# Altium PCB MONA-ALT-V21-2.PCBDOC
Units mm, origin at the board's own origin, x right, y up, seen from the top; angles counter-clockwise.
Board outline 152.4 x 101.6 mm, 2 copper layers (Top Layer, Bottom Layer); 80 components, 0 nets, 285 pads, 95 vias.
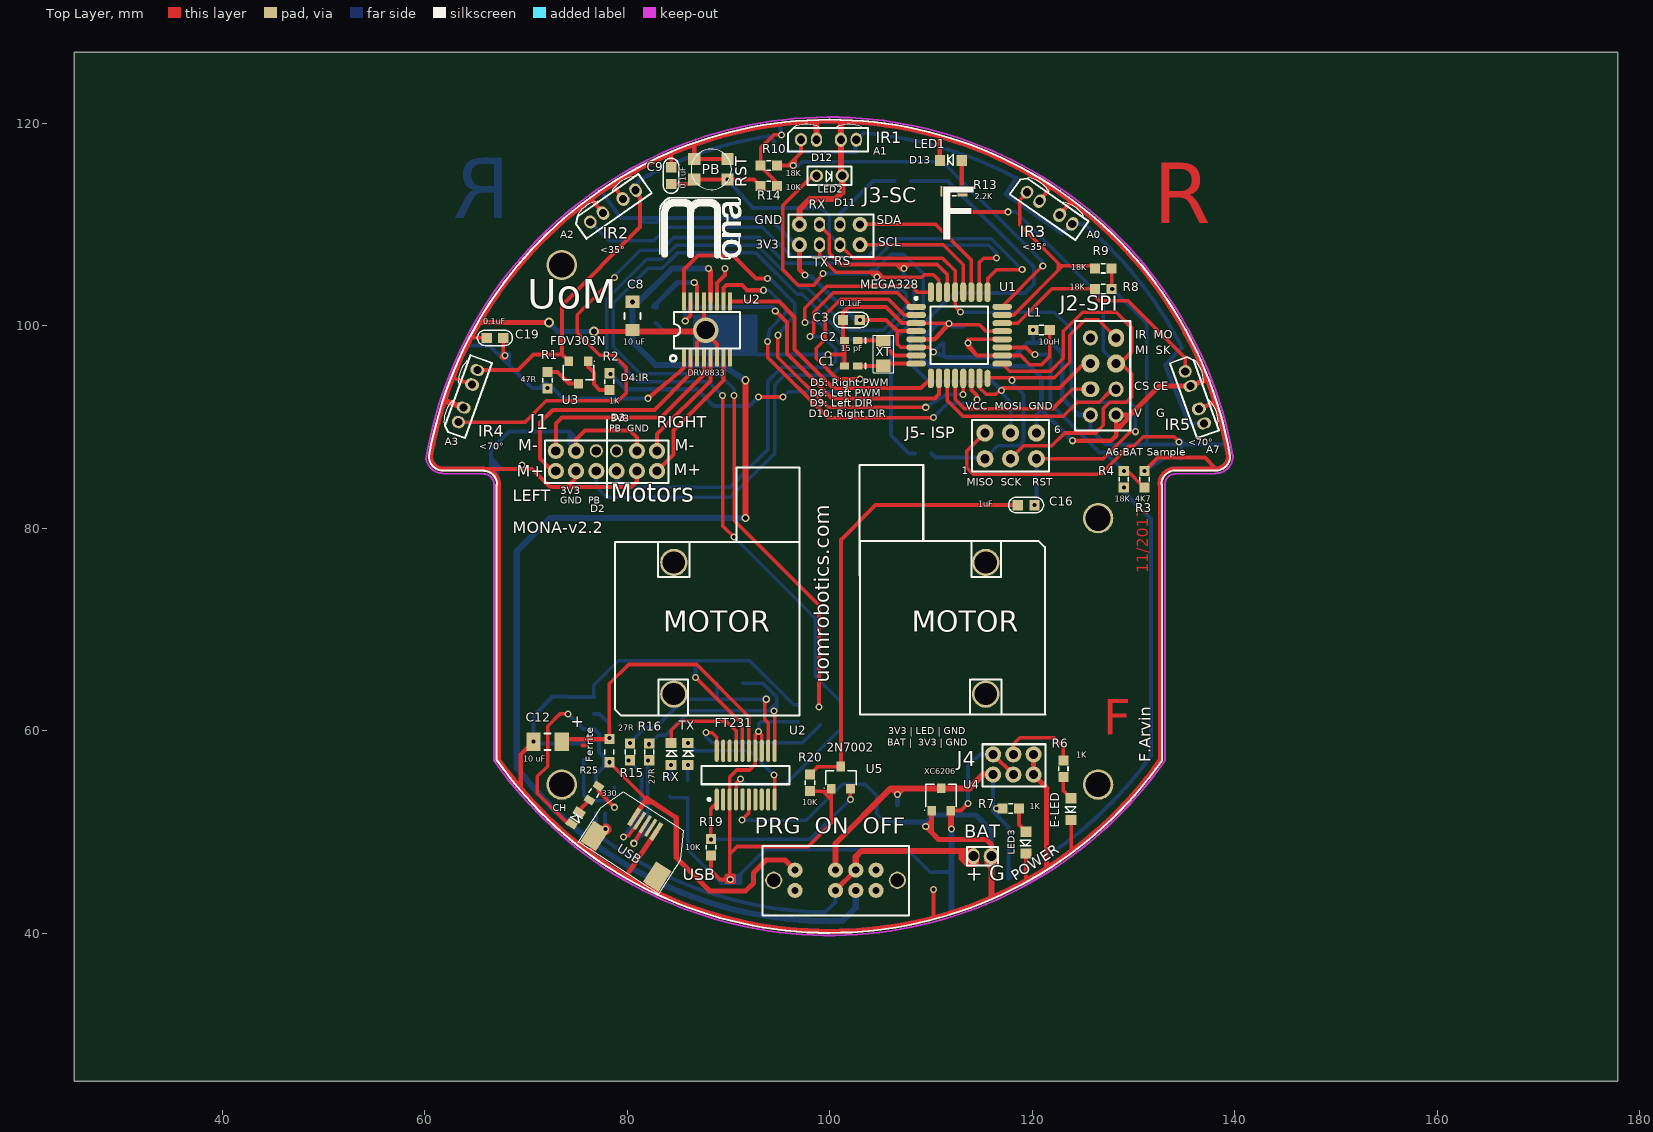
[diagram p0: Top Layer view]
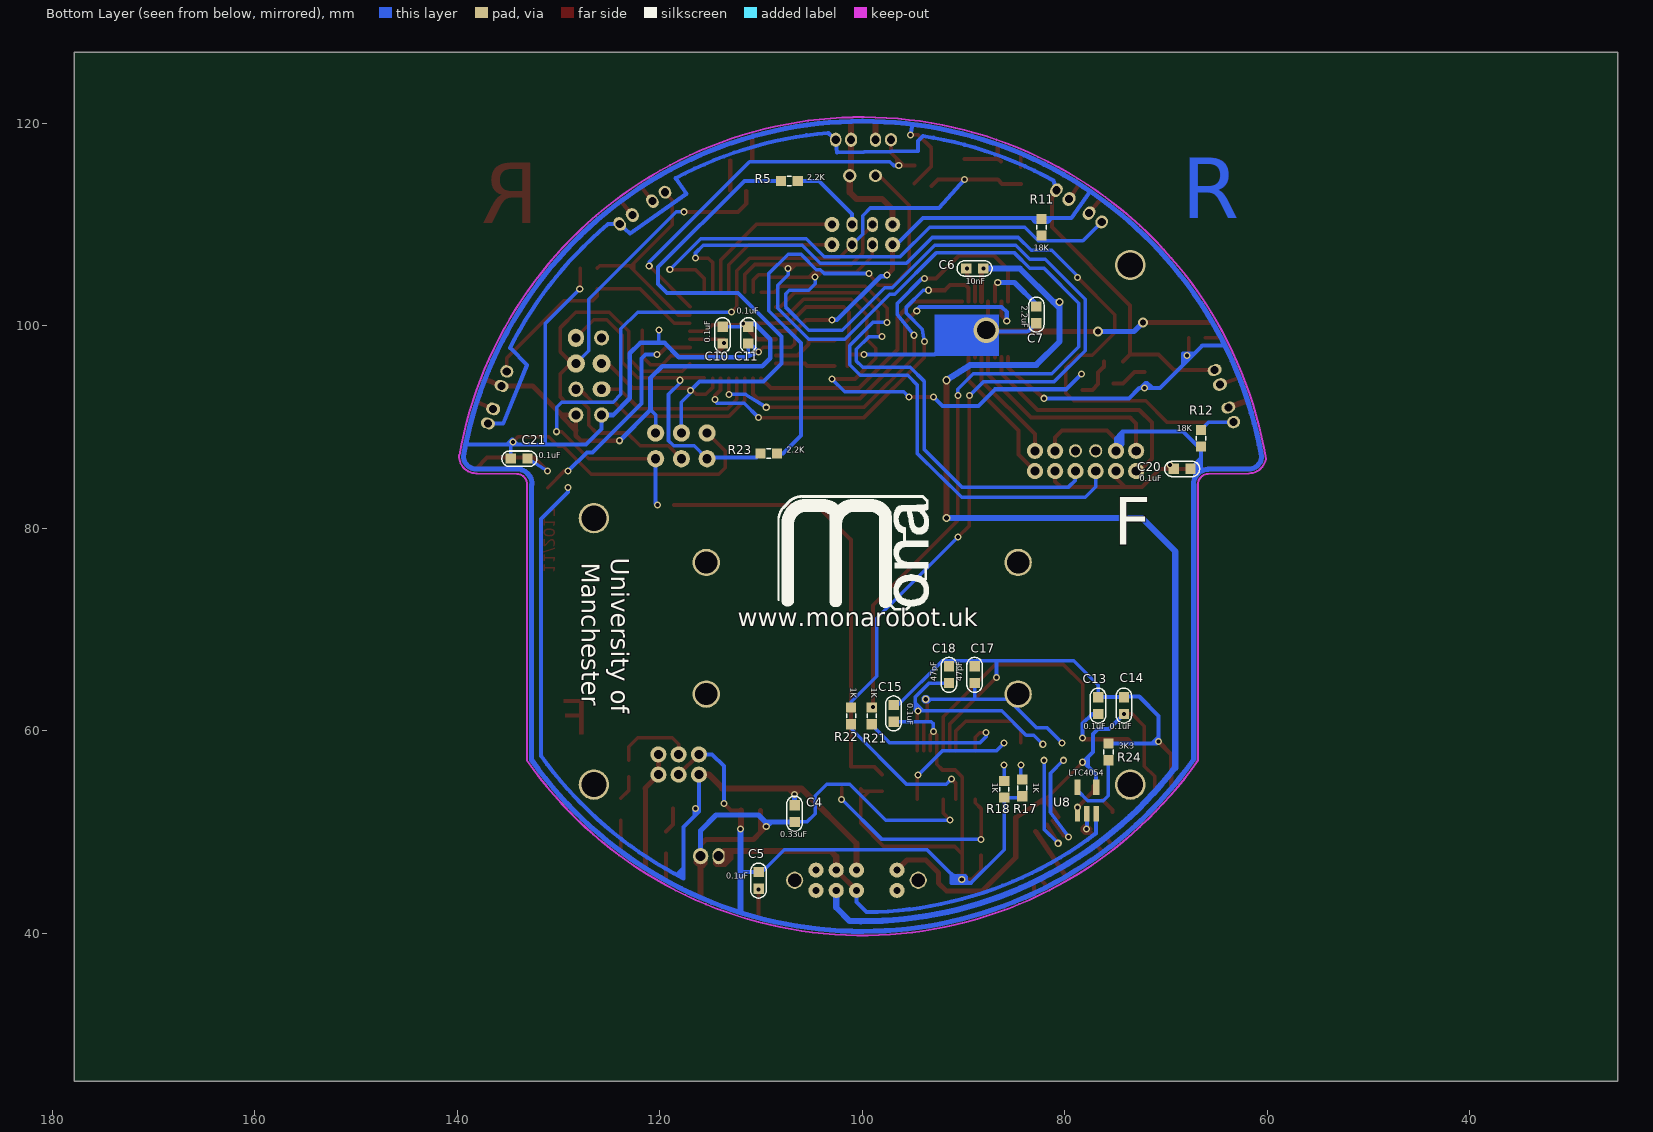
[diagram p1: Bottom Layer view, seen from below]

## Layer stack, top to bottom
Top Layer: signal copper 0.0356
Dielectric: dielectric 0.32, FR-4, Dk 4.8
Bottom Layer: signal copper 0.0356

## Board outline
25.4,25.4 177.8,25.4 177.8,127 25.4,127

## Design rules (kind name [scope] priority, off if disabled: settings)
Clearance [All] p1: gap=0.254
ComponentClearance [All] p1: gap=0.254 collisioncheckmode=3 verticalgap=0.254
PolygonConnect [All] p1: connectstyle=Relief reliefconductorwidth=0.254 reliefentries=4 polygonreliefangle="90 Angle"
RoutingVias [All] p1: holewidth=0.711 width=1.27 viastyle="Through Hole" minholewidth=0.711 minwidth=1.27 maxholewidth=0.711 maxwidth=1.27
SolderMaskExpansion [All] p1: expansion=0.102
TestPointUsage [All] p1: valid=0 allowmultiple=FALSE
Testpoint [All] p1: side=15 testpointundercomponent=TRUE minsize=1.016 maxsize=2.54 preferedsize=1.524 minholesize=0 maxholesize=1.016 preferedholesize=0.813 testpointgrid=0.025 style=1023 order=0123456789
Width [All] p1: maxlimit=0.254 minlimit=0.254 preferedwidth=0.254
18 further rules are at their usual default settings.

## Components (designator, comment, footprint, x,y, rotation, side; value= is the part's Value field where it differs from the comment)
2N7002 "U5" SOT23#1 101.092,55.372 r0 top (schematic designator V48)
BAT "+ G" MHDR1X2#1 114.427,47.625 r0 top
C1 "" 0402 102.108,96.012 r180 top
C2 "15 pF" 0402 102.108,98.552 r180 top
C3 "0.1uF" 0603C 102.108,100.584 r0 top (schematic designator C14)
C4 "0.33uF" 0603C 106.68,51.816 r90 bottom (schematic designator C14)
C5 "0.1uF" 0603C 110.236,45.212 r90 bottom (schematic designator C14)
C6 "10nF" 0603C 88.9,105.664 r180 bottom (schematic designator C14)
C7 "2.2uF" 0603C 82.804,101.092 r270 bottom (schematic designator C14)
C8 "10 uF" 3216[1206]#1 80.518,100.965 r90 top
C9 "0.1uF" 0603C 84.328,114.808 r90 top (schematic designator C14)
C10 "0.1uF" 0603C 113.792,99.06 r90 bottom (schematic designator C14)
C11 "0.1uF" 0603C 111.252,99.06 r90 bottom (schematic designator C14)
C12 "10 uF" 3216[1206]#2 72.136,58.928 r0 top
C13 "0.1uF" 0603C 76.708,62.484 r90 bottom (schematic designator C14)
C14 "0.1uF" 0603C 74.168,62.484 r90 bottom
C15 "0.1uF" 0603C 96.901,61.722 r90 bottom (schematic designator C14)
C16 "1uF" 0603C 119.38,82.296 r0 top (schematic designator C14)
C17 "47pF" 0603C 88.9,65.532 r90 bottom (schematic designator C14)
C18 "47pF" 0603C 91.44,65.532 r90 bottom (schematic designator C14)
C19 "0.1uF" 0603C 66.929,98.806 r0 top (schematic designator C14)
C20 "0.1uF" 0603C 68.402,85.865 r0 bottom (schematic designator C14)
C21 "0.1uF" 0603C 133.858,86.868 r0 bottom (schematic designator C14)
D4 "" 0805L#1 98.552,114.808 r180 top
D4 "CH" 0805L#2 74.168,50.292 r237 top
DRV8833 "U2" SSOP16 87.884,99.568 r0 top locked
E-LED "" 0805L#3 123.825,53.594 r90 top (schematic designator D4)
FDV303N "U3" SOT23#1 75.184,95.377 r180 top (schematic designator V48)
Ferrite "" R0603(1608)#1 78.232,57.912 r90 top (schematic designator R46)
FT231 "U2" SOP63P600X162-20N 91.694,55.626 r90 top
IR1 "Comment" "PCBComponent_1 - duplicate" 104.14,115.316 r0 top
IR2 "Comment" "PCBComponent_1 - duplicate" 83.82,111.76 r35 top
IR3 "Comment" "PCBComponent_1 - duplicate" 123.444,106.68 r325 top
IR4 "Comment" "PCBComponent_1 - duplicate" 68.58,96.012 r70 top
IR5 "Comment" "PCBComponent_1 - duplicate" 134.62,87.884 r290 top
J1 "Comment" HDR2X6_CEN#1 73.152,84.836 r0 top locked
J3-SC "Comment" HDR2X6_CEN#2 97.2,107.188 r0 top locked
J4 "Comment" HDR2X6_CEN#3 116.332,54.864 r0 top locked
"J5- ISP" "Comment" HDR2X3 115.316,86.868 r0 top locked
L1 "10uH" R0603(1608)#2 120.904,99.568 r0 top (schematic designator R46)
LED1 "" 0805L#3 113.284,116.332 r0 top (schematic designator D4)
LED2 "Comment" MHDR1X2#2 99.2,114.808 r0 top
LTC4054 "U8" LT5054 78.74,51.816 r90 bottom locked
MEGA328 "U1" 32A_M 112.776,99.06 r0 top locked
POWER "LED3" 0805L#3 119.38,50.292 r90 top (schematic designator D4)
R1 "47R" R0603(1608)#2 72.136,94.615 r270 top (schematic designator R46)
R2 "1K" R0603(1608)#2 78.232,94.488 r270 top (schematic designator R46)
R3 "4K7" R0603(1608)#2 131.064,84.836 r270 top (schematic designator R46)
R4 "18K" R0603(1608)#2 129.032,84.836 r270 top (schematic designator R46)
R5 "2.2K" R0603(1608)#2 107.188,114.3 r180 bottom (schematic designator R46)
R6 "1K" R0603(1608)#2 123.063,56.261 r90 top (schematic designator R46)
R7 "1K" R0603(1608)#2 117.856,52.324 r0 top (schematic designator R46)
R8 "18K" R0603(1608)#2 127,103.632 r0 top (schematic designator R46)
R9 "18K" R0603(1608)#2 127,105.664 r0 top (schematic designator R46)
R10 "18K" R0603(1608)#2 93.98,115.824 r0 top (schematic designator R46)
R11 "18K" R0603(1608)#2 82.296,109.728 r90 bottom (schematic designator R46)
R12 "18K" R0603(1608)#2 66.548,88.9 r90 bottom (schematic designator R46)
R13 "2.2K" R0603(1608)#2 112.268,113.284 r0 top (schematic designator R46)
R14 "10K" R0603(1608)#2 93.98,113.792 r0 top (schematic designator R46)
R15 "27R" R0603(1608)#2 80.264,57.912 r90 top (schematic designator R46)
R16 "27R" R0603(1608)#2 82.169,57.912 r90 top (schematic designator R46)
R17 "1K" R0603(1608)#2 84.201,54.356 r270 bottom (schematic designator R46)
R18 "1K" R0603(1608)#2 85.979,54.229 r270 bottom (schematic designator R46)
R19 "10K" R0603(1608)#2 88.265,48.514 r90 top (schematic designator R46)
R20 "10K" R0603(1608)#2 98.044,54.864 r90 top (schematic designator R46)
R21 "1K" R0603(1608)#2 99.06,61.468 r270 bottom (schematic designator R46)
R22 "1K" R0603(1608)#2 101.092,61.468 r270 bottom (schematic designator R46)
R23 "2.2K" R0603(1608)#2 109.22,87.376 r180 bottom (schematic designator R46)
R24 "3K3" R0603(1608)#2 75.692,57.912 r90 bottom (schematic designator R46)
R25 "330" R0603(1608)#3 76.708,53.848 r57 top (schematic designator R46)
RST "Comment" "PCBComponent_1 - duplicate4" 88.392,115.316 r0 top
RX "" 0805L#3 84.328,56.388 r270 top (schematic designator D4)
TX "" 0805L#3 85.979,56.388 r270 top (schematic designator D4)
USB "Comment" DIP30 78.232,43.688 r57 top locked
XC6206 "U4" SOT23#2 110.998,53.213 r0 top (schematic designator V48)
? "Comment" "PCBComponent_1 - duplicate3" 106.172,97.536 r90 top
? "Comment" "PCBCOMPONENT_1 - DUPLICATE19" 99.568,45.212 r0 top locked
? "Comment" "PCBCOMPONENT_1 - DUPLICATE17" 81.5,70 r0 top locked
? "Comment" "PCBCOMPONENT_1 - DUPLICATE17" 118.5,70.252 r180 top locked
? "J2-SPI" "PCBComponent_1 - duplicate18" 129.54,89.916 r180 top

## Footprints (in the part's own frame and the unit in brackets; to place one, negate y for a bottom-side part, rotate by r counter-clockwise, add the part's x,y. Pads: shape width x height; smd on the part's side, far side on the other; paste and mask are expansions set on the pad)
32A_M [mm] "Thin QFP, 32-Leads, Body 7x7mm, Pitch 0.8mm, IPC Low Density"
  oval 1.95x0.6 smd: 1(-4.25,2.8) 2(-4.25,2) 3(-4.25,1.2) 4(-4.25,0.4) 5(-4.25,-0.4) 6(-4.25,-1.2) 7(-4.25,-2) 8(-4.25,-2.8) 17(4.25,-2.8) 18(4.25,-2) 19(4.25,-1.2) 20(4.25,-0.4) 21(4.25,0.4) 22(4.25,1.2) 23(4.25,2) 24(4.25,2.8)
  oval 0.6x1.95 smd: 9(-2.8,-4.25) 10(-2,-4.25) 11(-1.2,-4.25) 12(-0.4,-4.25) 13(0.4,-4.25) 14(1.2,-4.25) 15(2,-4.25) 25(2.8,4.25) 26(2,4.25) 27(1.2,4.25) 28(0.4,4.25) 29(-0.4,4.25) 30(-1.2,4.25) 31(-2,4.25) 32(-2.8,4.25)
  oval 0.6x1.7 smd: 16(2.8,-4.25)
  silkscreen extent -4.37,-2.85 2.85,3.77
0402 [mm] "Chip Capacitor; Body 1.0 x 0.5 mm (LxW typ)"
  rect 0.9x0.7 smd: 1(-0.65,0) 2(0.65,0)
  silkscreen extent -1.4,-0.25 -1.4,0.25
0603C [mil]
  rect 40x40 smd: 1(-32,-0.5) 2(33,-0.5)
  silkscreen extent -68,-30 68,30
0805L#1 [mm]
  silkscreen extent -1.64,-0.48 -1.11,0.58
0805L#2 [mm]
  rect 0.7x1.1 smd: 1(-0.635,0) 2(-2.032,0)
  silkscreen extent -1.64,-0.48 -1.11,0.58
0805L#3 [mm]
  rect 1x1.1 smd: 1(-0.254,0) 2(-2.413,0)
  silkscreen extent -1.64,-0.48 -1.11,0.58
3216[1206]#1 [mm] "Chip Resistor; Body 3.2 x 1.6 mm (LxW typ)"
  rect 1.2x1.4 smd: 1(-1.4,0) 2(1.4,0)
  silkscreen extent -0.3,-0.8 0.3,0.8
3216[1206]#2 [mm] "Chip Resistor; Body 3.2 x 1.6 mm (LxW typ)"
  rect 1.4x1.8 smd: 1(-1.4,0) 2(1.4,0)
  silkscreen extent -0.3,-0.8 0.3,0.8
DIP30 [mm]
  rect 2.45x1.8 smd: 0(4.191,4.445) 0(4.191,-2.921)
  rect 2x0.35 smd: " "(7.874,0.235) " "(7.874,0.885) ""(7.874,1.535)
  rect 2x0.45 smd: GND(7.874,-0.415) VDD(7.874,2.185)
  silkscreen extent 2.76,-3.98 9.4,5.46
HDR2X3 [mm] "Connector; Header; 3x2 Position"
  round 1.7 hole 0.9: 1(0,0) 2(0,2.54) 3(2.54,0) 4(2.54,2.54) 5(5.08,0) 6(5.08,2.54)
  silkscreen extent -1.27,-1.27 6.35,3.81
HDR2X6_CEN#1 [mm] "Connector; Header; 6x2 Position"
  round 1.6 hole 0.9: ELGND(1.792,0.812) L+(-0.208,0.812) L-(-0.208,2.812) L-B(3.792,0.812) LE3V3(1.792,2.812) R+(9.792,0.812) R-(9.792,2.812) R-B(5.792,0.812) RE3V3(7.792,2.812) REGND(7.792,0.812)
  round 1.3 hole 0.9: L-A(3.792,2.812) R-A(5.792,2.812)
  silkscreen extent -1.27,-0.38 10.92,3.81
HDR2X6_CEN#2 [mm] "Connector; Header; 6x2 Position"
  round 1.5 hole 0.8: 3V3(-0.208,0.812) GND(-0.208,2.812) SCL(5.792,0.812) SDA(5.792,2.812)
  oval 1.1x1.5 hole 0.8: GPIO(3.792,2.812) RST(3.792,0.812) RX(1.792,2.812) TX(1.792,0.812)
  silkscreen extent -1.27,-0.38 7.11,3.81
HDR2X6_CEN#3 [mm] "Connector; Header; 6x2 Position"
  round 1.6 hole 0.9: 3V3(-0.208,2.812) 4V2(-0.208,0.812) GND(3.792,0.812) GND(3.792,2.812) ""(1.792,0.812) ""(1.792,2.812)
  silkscreen extent -1.27,-0.38 4.95,3.81
LT5054 [mm]
  rect 1.5x0.518 smd: BAT(0,-1.84) GND(0,-0.92) LED(0,0)
  rect 1.5x0.62 smd: PROG(2.62,0) VCC(2.62,-1.84)
MHDR1X2#1 [mm] "Connector; Header; 2 Position"
  oval 1.2x1.6 hole 1: 1(-0.254,0)
  oval 1.5x1.6 hole 1: 2(1.524,0)
  silkscreen extent -0.9,-0.9 2.17,0.9
MHDR1X2#2 [mm] "Connector; Header; 2 Position"
  oval 1.3x1.2 hole 0.8: 1(-0.508,0)
  round 1.3 hole 0.8: 2(2.032,0)
  silkscreen extent -1.4,-0.9 2.92,0.9
"PCBComponent_1 - duplicate" [mm]
  oval 1.1x1.4 hole 0.8: D-A(-1.524,3.048) T-E(-5.461,3.048)
  oval 1.2x1.4 hole 0.8: D-C(-3.048,3.048)
  oval 1.2x1.3 hole 0.8: T-C(-6.985,3.048)
  silkscreen extent -8.25,1.91 -0.38,4.58
"PCBComponent_1 - duplicate3" [mm]
  rect 1.2x1.4 smd: X(-1.49,0.889) X(0.91,0.889)
  silkscreen extent -2.16,-0.13 1.52,1.91
"PCBComponent_1 - duplicate4" [mm]
  rect 1.2x1.2 smd: A(-1.778,-0.889) A(1.524,-0.889) B(-1.778,1.143) B(1.524,1.143)
  silkscreen extent -2.09,-1.87 1.91,2.13
"PCBCOMPONENT_1 - DUPLICATE17" [mm]
  round 2.7 hole 2.2: 0(3.103,6.626) 1(3.103,-6.374)
  silkscreen extent -2.73,-8.51 15.52,16
"PCBComponent_1 - duplicate18" [mm]
  round 1.5 hole 0.9: "1 GND"(1.27,-1.27) "2 Vcc"(3.81,-1.27) "3 CE"(1.27,-3.81) "9 IRQ"(3.81,-8.89)
  oval 1.8x1.5 hole 0.9: "4 CS"(3.81,-3.81)
  round 1.8 hole 0.9: "5 SCK"(1.27,-6.35) "6 MOSI"(3.81,-6.35)
  oval 1.6x1.8 hole 0.9: "7 MISO"(1.27,-8.89)
  silkscreen extent -0.13,-10.54 5.33,0.25
"PCBCOMPONENT_1 - DUPLICATE19" [mm]
  round 1.7 hole 1.3: 1(-5.102,0.034) 1(7.098,0.034)
  round 1.5 hole 0.7: 1(-3.002,1.034) 2(0.998,1.034) 3(2.998,1.034) 4(4.998,1.034) 5(-3.002,-0.966) 6(0.998,-0.966) 7(2.998,-0.966) 8(4.998,-0.966)
  silkscreen extent -6.22,-3.43 8.25,3.43
R0603(1608)#1 [mm] "Chip Resistor, Body 1.6x0.8mm, IPC Medium Density"
  rect 1x1 smd: 1(-1.016,0) 2(1.27,0)
  silkscreen extent -0.2,-0.46 0.2,0.46, body extent -0.85,-0.48 0.85,0.48, height 0.6
R0603(1608)#2 [mm] "Chip Resistor, Body 1.6x0.8mm, IPC Medium Density"
  rect 1x1 smd: 1(-0.82,0) 2(0.82,0)
  silkscreen extent -0.2,-0.46 0.2,0.46, body extent -0.85,-0.48 0.85,0.48, height 0.6
R0603(1608)#3 [mm] "Chip Resistor, Body 1.6x0.8mm, IPC Medium Density"
  rect 0.7x1 smd: 1(-0.82,0) 2(0.82,0)
  silkscreen extent -0.2,-0.46 0.2,0.46, body extent -0.85,-0.48 0.85,0.48, height 0.6
SOP63P600X162-20N [mm] "SOP, 20-Leads, Body 8.7x3.9mm (max), Pitch 0.63mm, IPC Medium Density"
  oval 2.2x0.4 smd: 1(-2.4,2.857) 2(-2.4,2.222) 3(-2.4,1.587) 4(-2.4,0.952) 5(-2.4,0.317) 6(-2.4,-0.318) 7(-2.4,-0.953) 8(-2.4,-1.588) 9(-2.4,-2.222) 10(-2.4,-2.857) 11(2.4,-2.857) 12(2.4,-2.222) 13(2.4,-1.587) 14(2.4,-0.952) 15(2.4,-0.317) 16(2.4,0.318) 17(2.4,0.953) 18(2.4,1.588) 19(2.4,2.222) 20(2.4,2.857)
  silkscreen extent -2.52,-4.35 0.9,4.35, body extent -1.95,-4.33 1.95,4.33, height 1.62
SOT23#1 [mm] "SOT23, 3-Leads, Body 2.9x1.3mm, Pitch 0.95mm, Lead Span 2.5mm, IPC Medium Density"
  rect 0.85x0.95 smd: Drain(0,1.1) Gate(-0.95,-1.1) S(0.95,-1.1)
  silkscreen extent -1.5,-0.7 1.5,0.7, body extent -1.5,-0.7 1.5,0.7, height 1.1
SOT23#2 [mm] "SOT23, 3-Leads, Body 2.9x1.3mm, Pitch 0.95mm, Lead Span 2.5mm, IPC Medium Density"
  rect 0.85x0.95 smd: GND(-0.95,-1.1) IN(0,1.1) OUT(0.95,-1.1)
  silkscreen extent -1.5,-0.7 1.5,1.52, body extent -1.5,-0.7 1.5,0.7, height 1.1
SSOP16 [mm] "SSOP; 16 Leads; Body Width 5.3 mm; Pitch 0.65 mm"
  rect 0.4x1.8 smd: 1(-2.275,-2.68) 2(-1.625,-2.68) 3(-0.975,-2.68) 4(-0.325,-2.68) 5(0.325,-2.68) 6(0.975,-2.68) 7(1.625,-2.68) 8(2.275,-2.68) 9(2.275,2.82) 10(1.625,2.82) 11(0.975,2.82) 12(0.325,2.82) 13(-0.325,2.82) 14(-0.975,2.82) 15(-1.625,2.82) 16(-2.275,2.82)
  silkscreen extent -3.65,-3.09 3.25,1.8

## Part data
2N7002 FDV303N XC6206: library part FDV301N, "N-Channel MOSFET, 0.22A, 25V Vgs=2.7V Rds(on)=5"
C3 C4 C5 C6 C7 C9 C10 C11 C13 C14 C15 C16 C17 C18 C19 C20 C21: library part CAP, "Capacitor"
D4 D4 E-LED LED1 POWER RX TX: library part LED0, "Typical INFRARED GaAs LED"
Ferrite L1 R1 R2 R3 R4 R5 R6 R7 R8 R9 R10 R11 R12 R13 R14 R15 R16 R17 R18 R19 R20 R21 R22 R23 R24 R25: library part "R47 0603 5%", "Resistencia SMT Generica"

## Free pads (board coordinates)
  round 3 hole 2.5: 0(73.533,54.692) 0(73.533,106) 0(126.492,54.692) 0(126.492,81)

## Via types
v1: diameter 0.7, hole 0.4, Top Layer to Bottom Layer, 89 vias
v2: diameter 0.8, hole 0.5, Top Layer to Bottom Layer, 3 vias
v3: diameter 1, hole 0.6, Top Layer to Bottom Layer, 2 vias
v4: diameter 2.5, hole 1.8, Top Layer to Bottom Layer, 1 vias

## Nets (pads, with @x,y where several pads share a name; then routed paths per layer and width w, separated by ;. In a path a pad name is that pad's centre, name@x,y a point inside that pad or via, vN(x,y) a via of type N, cw(c..) or ccw(c..) an arc to the next point about the centre after c; other vN are vias at no path point)
pads on no net: 2N7002.Drain 2N7002.Gate 2N7002.S "?.1 GND" "?.2 Vcc" "?.3 CE" "?.4 CS" "?.5 SCK" "?.6 MOSI" "?.7 MISO" "?.9 IRQ" "J5- ISP.1" "J5- ISP.2" "J5- ISP.3" "J5- ISP.4" "J5- ISP.5" "J5- ISP.6" "USB. " ?.0 ?.1 ?.2 ?.3 ?.4 ?.5 ?.6 ?.7 ?.8 ?.X BAT.1 BAT.2 C1.1 C1.2 C2.1 C2.2 C3.1 C3.2 C4.1 C4.2 C5.1 C5.2 C6.1 C6.2 C7.1 C7.2 C8.1 C8.2 C9.1 C9.2 C10.1 C10.2 C11.1 C11.2 C12.1 C12.2 C13.1 C13.2 C14.1 C14.2 C15.1 C15.2 C16.1 C16.2 C17.1 C17.2 C18.1 C18.2 C19.1 C19.2 C20.1 C20.2 C21.1 C21.2 D4.1 D4.2 DRV8833.1 DRV8833.2 DRV8833.3 DRV8833.4 DRV8833.5 DRV8833.6 DRV8833.7 DRV8833.8 DRV8833.9 DRV8833.10 DRV8833.11 DRV8833.12 DRV8833.13 DRV8833.14 DRV8833.15 DRV8833.16 E-LED.1 E-LED.2 FDV303N.Drain FDV303N.Gate FDV303N.S Ferrite.1 Ferrite.2 FT231.1 FT231.2 FT231.3 FT231.4 FT231.5 FT231.6 FT231.7 FT231.8 FT231.9 FT231.10 FT231.11 FT231.12 FT231.13 FT231.14 FT231.15 FT231.16 FT231.17 FT231.18 FT231.19 FT231.20 IR1.D-A IR1.D-C IR1.T-C IR1.T-E IR2.D-A IR2.D-C IR2.T-C IR2.T-E IR3.D-A IR3.D-C IR3.T-C IR3.T-E IR4.D-A IR4.D-C IR4.T-C IR4.T-E IR5.D-A IR5.D-C IR5.T-C IR5.T-E J1.ELGND J1.L+ J1.L- J1.L-A J1.L-B J1.LE3V3 J1.R+ J1.R- J1.R-A J1.R-B J1.RE3V3 J1.REGND J3-SC.3V3 J3-SC.GND J3-SC.GPIO J3-SC.RST J3-SC.RX J3-SC.SCL J3-SC.SDA J3-SC.TX J4. J4.3V3 J4.4V2 J4.GND L1.1 L1.2 LED1.1 LED1.2 LED2.1 LED2.2 LTC4054.BAT LTC4054.GND LTC4054.LED LTC4054.PROG LTC4054.VCC MEGA328.1 MEGA328.2 MEGA328.3 MEGA328.4 MEGA328.5 MEGA328.6 MEGA328.7 MEGA328.8 MEGA328.9 MEGA328.10 MEGA328.11 MEGA328.12 MEGA328.13 MEGA328.14 MEGA328.15 MEGA328.16 MEGA328.17 MEGA328.18 MEGA328.19 MEGA328.20 MEGA328.21 MEGA328.22 MEGA328.23 MEGA328.24 MEGA328.25 MEGA328.26 MEGA328.27 MEGA328.28 MEGA328.29 MEGA328.30 MEGA328.31 MEGA328.32 POWER.1 POWER.2 R1.1 R1.2 R2.1 R2.2 R3.1 R3.2 R4.1 R4.2 R5.1 R5.2 R6.1 R6.2 R7.1 R7.2 R8.1 R8.2 R9.1 R9.2 R10.1 R10.2 R11.1 R11.2 R12.1 R12.2 R13.1 R13.2 R14.1 R14.2 R15.1 R15.2 R16.1 R16.2 R17.1 R17.2 R18.1 R18.2 R19.1 R19.2 R20.1 R20.2 R21.1 R21.2 R22.1 R22.2 R23.1 R23.2 R24.1 R24.2 R25.1 R25.2 RST.A RST.B RX.1 RX.2 TX.1 TX.2 USB. USB.0 USB.GND USB.VDD XC6206.GND XC6206.IN XC6206.OUT
copper on no net: | length 3123.6
  Top Layer w0.2: 70.231,85.852 69.85,86.233 v1(69.596,86.233) ; v1(69.596,86.233) 69.215,85.852 69.088,85.852 69.469,86.233 v1(69.596,86.233)
  Top Layer w0.35: 63.327,90.491 69.917,90.491 72.009,92.583 79.121,92.583 79.883,93.345 79.883,95.885 78.676,97.091 77.279,97.091 75.057,99.314 75.057,100.711 75.057,101.092 v1(78.74,104.775) ; 64.656,98.793 66.116,98.793 ; 67.767,98.793 v1@67.767,97.231 ; v1(74.155,61.671) 73.355,61.671 72.136,60.452 72.136,56.515 71.12,55.499 71.12,53.848 74.143,50.825 74.514,50.825 ; v1(78.232,56.896) 81.788,53.34 81.915,53.34 ; v1(78.232,59.309) 78.232,64.643 80.137,66.548 86.868,66.548 92.011,61.404 92.011,58.026 ; v1(79.629,49.53) 79.756,49.53 79.883,49.657 80.137,49.657 81.233,51.128 ; v1(80.645,48.895) 81.778,50.774 ; 84.328,58.801 84.328,60.071 85.217,60.96 89.789,60.96 90.742,60.008 90.742,58.026 ; 84.341,115.646 84.341,117.081 ; v1(86.741,65.278) 91.376,60.642 91.376,58.026 ; v1(87.757,59.817) 88.392,59.817 88.837,59.372 88.837,58.026 ; v1@88.265,49.334 88.265,52.324 88.837,52.895 88.837,53.226 ; v1(89.408,93.091) 89.408,80.264 v1(90.551,79.121) ; v1(90.17,45.339) 90.106,45.148 90.106,55.435 90.805,56.134 92.075,56.134 92.647,56.706 92.647,58.026 92.647,59.627 v1(92.964,59.944) 93.281,59.627 93.281,58.026 ; 90.17,47.879 90.871,48.58 97.856,48.58 100.142,50.866 100.142,54.272 99.914,54.044 98.044,54.044 ; v1(90.551,93.091) 90.551,80.899 90.551,80.772 98.933,72.39 v1(98.933,62.357) ; 90.742,53.226 90.742,54.8 v1(91.186,55.245) ; v1(91.313,51.181) 92.011,51.88 92.011,53.226 ; 92.582,114.37 93.16,113.792 ; v1(92.964,92.964) v1(95.377,92.964) ; v1(93.726,63.119) 93.726,62.865 93.599,62.738 93.599,61.087 93.916,60.77 93.916,58.026 ; v1(93.853,98.425) 93.853,96.901 99.822,90.932 v1(110.236,90.932) ; v1(94.488,55.626) 94.551,55.562 94.551,53.226 ; v1(94.488,61.976) 94.488,61.722 94.551,61.658 94.551,58.026 ; 94.8,115.824 95.885,115.824 ; v1(94.869,99.06) 94.869,96.901 99.822,91.948 v1(109.474,91.948) ; 94.869,114.046 93.16,115.755 93.16,115.824 93.16,117.544 94.456,118.84 v1(95.218,118.84) ; 96.603,116.542 96.603,116.161 96.266,115.824 95.885,115.824 ; 97.155,118.364 97.155,117.094 95.885,115.824 ; v1(97.536,100.33) 97.536,101.727 99.695,103.886 108.077,103.886 108.653,103.31 109.976,103.31 ; 98.044,55.684 98.832,56.472 101.092,56.472 ; v1(98.044,98.933) 98.425,99.314 98.425,101.346 100.33,103.251 106.68,103.251 108.071,101.86 108.526,101.86 ; 98.692,114.808 98.298,114.808 95.377,111.887 95.377,105.537 96.901,104.013 98.425,104.013 v1(99.314,105.156) ; 98.992,108 98.992,106.875 100.584,105.283 104.394,105.283 v1@104.902,104.775 ; 98.992,110 98.992,109.923 99.949,108.966 99.949,107.188 101.092,106.045 110.617,106.045 111.576,105.086 111.576,103.31 ; 99.314,54.044 99.314,54.041 100.142,53.213 ; 100.992,108 102.312,106.68 111.125,106.68 112.376,105.429 112.376,103.31 112.376,101.873 v1(112.903,101.346) ; v1@102.042,53.025 102.042,54.399 ; 102.992,108 111.202,108 113.176,106.026 113.176,103.31 ; 102.992,110 110.472,110 113.976,106.496 113.976,103.31 ; v1(102.997,94.742) 100.711,94.742 98.679,96.774 98.679,97.79 99.568,98.679 99.568,101.092 101.092,102.616 105.791,102.616 107.347,101.06 108.526,101.06 ; 106.553,106.045 107.061,105.537 107.315,105.537 107.823,106.045 ; 106.661,99.46 106.661,98.19 106.991,97.86 108.526,97.86 109.785,97.86 v1(110.236,97.409) ; 110.776,103.31 110.776,104.489 110.236,105.029 109.347,105.029 109.093,104.775 v1@104.902,104.775 ; 111.576,94.81 111.576,92.64 113.157,91.059 123.063,91.059 124.46,92.456 126.619,92.456 127.762,93.599 128.016,93.599 ; v1@112.014,100.076 114.808,100.076 115.424,99.46 117.026,99.46 ; 112.376,94.81 112.376,92.729 113.284,91.821 122.047,91.821 123.952,93.726 125.73,93.726 ; 112.903,48.133 112.903,47.371 113.538,46.736 114.427,46.736 114.554,46.863 114.554,48.006 114.427,48.133 113.665,48.133 113.411,47.879 ; v1@113.176,93.345 113.176,94.81 ; 113.411,47.371 113.411,47.879 ; 114.776,94.81 114.776,93.885 115.443,93.218 116.382,93.218 117.017,93.853 119.444,93.853 122.682,93.853 125.349,96.52 ; 114.776,103.31 114.776,106.267 115.189,106.68 v1(116.459,106.68) ; 115.316,86.233 115.316,86.868 ; 115.316,89.408 113.538,87.63 113.538,85.979 114.173,85.344 126.746,85.344 128.175,86.773 129.508,88.106 130.016,88.106 130.937,89.027 133.985,89.027 v1(134.493,88.519) ; 115.443,47.244 115.443,46.863 115.697,46.609 ; 115.576,94.869 122.174,94.869 123.698,96.393 123.698,99.06 125.222,100.584 126.492,100.584 128.27,98.806 ; 115.576,103.31 115.576,104.654 116.459,105.537 v1(118.999,105.537) ; 115.951,46.482 116.459,46.99 116.459,47.117 ; 117,101.887 v1(121.031,105.918) ; 117.026,96.26 117.782,95.504 121.793,95.504 123.063,96.774 123.063,99.441 124.968,101.346 128.27,101.346 129.794,99.822 129.794,97.409 128.651,96.266 ; 117.026,98.66 113.646,98.66 ; 117.026,100.26 118.548,100.26 121.92,103.632 126.18,103.632 126.18,102.928 126.619,102.489 129.413,102.489 135.095,96.807 135.095,95.49 ; 117.026,101.06 118.168,101.06 122.917,105.81 118.745,109.982 118.745,112.395 119.47,113.12 119.47,113.183 ; 117.856,86.868 119.126,88.138 121.92,88.138 123.19,89.408 126.238,89.408 127,90.17 127,91.821 127.635,92.456 129.286,92.456 129.794,92.964 129.794,95.25 128.778,96.266 128.27,96.266 ; 118.124,57.676 118.124,58.688 118.745,59.309 122.174,59.309 123.063,58.42 123.063,57.081 ; 120.396,86.868 127,86.868 129.667,89.535 v1(130.175,89.535) ; 121.724,99.568 121.724,96.959 120.904,96.139 119.761,96.139 118.84,97.06 117.026,97.06 114.522,97.06 ; 123.063,55.441 123.063,54.102 123.825,53.34 ; 123.825,48.133 123.825,51.181 ; 126.18,105.664 125.926,105.918 123.026,105.918 122.809,105.918 122.555,106.172 ; v1@127.82,103.632 127.82,105.664 ; v1(129.032,85.656) 129.424,85.656 131.064,84.016 ; v1@67.767,97.231 67.564,97.028 67.564,96.901 67.691,96.774 67.945,96.774 68.072,96.901 68.072,96.926 v1@67.767,97.231 ; v1@104.902,104.775 105.283,104.775 104.775,105.283 104.14,105.283 104.14,105.156 104.521,104.775 v1@104.902,104.775 ; 113.411,47.879 113.919,47.371 113.919,46.736 113.157,47.498 113.157,47.625 112.903,47.879 113.411,47.879 ; 113.646,98.66 v1(113.646,98.298) 114.522,97.06 ; 113.646,98.66 113.646,97.936 114.522,97.06 ; 122.555,106.172 122.555,105.537 122.555,106.172
  Top Layer w0.4: 62.357,85.852 70.612,85.852 72.39,84.074 74.041,84.074 ; 62.738,94.869 64.673,94.19 ; 65.195,95.622 69.206,95.622 70.739,97.155 73.556,97.155 ; 72.136,95.435 73.094,95.435 74.252,94.277 75.184,94.277 ; 72.944,85.648 72.594,85.648 71.374,86.868 71.374,90.424 72.644,91.694 82.677,91.694 86.259,95.276 86.259,96.888 ; 72.944,87.648 72.944,90.343 73.533,90.932 83.312,90.932 87.559,95.179 87.559,96.888 ; 74.234,96.477 73.556,97.155 ; 74.944,85.648 74.944,84.977 74.041,84.074 ; 74.944,87.648 74.944,88.787 75.819,89.662 80.264,89.662 80.944,88.982 80.944,87.648 ; 75.275,51.996 75.275,52.174 76.261,53.16 ; 75.311,48.641 75.311,48.768 75.946,49.403 ; 75.565,58.547 75.819,58.547 ; 76.134,96.477 76.134,95.951 76.708,95.377 76.708,94.234 77.274,93.668 78.232,93.668 ; 76.454,47.879 76.454,48.26 76.835,48.641 ; 76.454,112.522 77.598,111.124 ; 77.155,54.536 77.155,54.036 v1(78.74,52.451) ; 77.343,49.911 77.978,49.911 78.232,50.165 78.232,50.419 77.978,50.673 77.851,50.673 77.47,50.292 ; 78.613,113.919 79.575,112.509 ; 80.823,113.383 80.823,113.106 81.28,112.649 81.28,109.728 73.556,102.004 73.556,97.155 ; 80.944,85.648 80.944,84.627 80.391,84.074 74.041,84.074 ; 81.629,52.907 82.581,52.907 ; 81.661,44.577 82.296,45.212 82.296,45.339 ; v1(82.042,92.837) 85.09,95.377 85.609,95.896 85.609,96.888 ; 82.804,44.069 83.058,44.323 83.058,44.704 ; 82.944,85.648 84.585,87.289 84.585,89.665 86.36,91.44 89.509,94.589 89.509,96.888 ; 82.944,87.648 82.944,89.294 88.209,94.559 88.209,96.888 ; 84.341,113.995 86.182,113.995 86.614,114.427 v1(89.916,114.427) 92.525,114.427 93.16,113.792 ; 85.609,102.388 85.609,105.548 86.995,106.934 90.424,106.934 92.699,104.659 v1(93.853,104.659) ; v1(85.725,100.457) 86.259,100.991 86.259,102.388 ; 86.304,116.211 86.614,116.459 ; v1(86.614,104.267) 86.909,103.972 86.909,102.388 ; 86.614,117.856 86.614,116.459 ; 86.909,96.888 86.909,98.339 v4@87.249,98.679 ; v4@87.559,100.513 87.559,102.388 ; v1(88.011,105.664) v1@88.209,105.466 ; 88.265,47.694 88.265,46.228 89.154,45.339 v1(90.17,45.339) ; v4@88.392,98.679 88.859,98.212 88.859,96.888 ; 88.859,102.388 88.859,104.226 89.662,105.029 v1(89.662,105.664) ; 89.509,102.388 89.509,103.733 89.789,104.013 91.313,104.013 91.821,103.505 v1(93.472,103.505) ; 89.916,116.459 86.614,116.459 ; 90.106,45.72 90.551,45.72 ; 90.159,102.388 94.97,102.388 96.52,100.838 96.52,97.663 100.33,93.853 109.019,93.853 109.976,94.81 ; v1(94.615,101.473) 95.758,100.33 95.758,97.282 100.203,92.837 110.363,92.837 110.776,93.25 110.776,94.81 ; v1(99.822,97.155) 101.458,97.155 ; 101.092,56.472 101.092,78.867 104.508,82.283 118.567,82.283 ; 101.458,96.012 101.458,98.552 101.295,98.715 101.295,100.571 101.295,101.295 101.854,101.854 105.537,101.854 107.131,100.26 108.526,100.26 v1(111.76,100.203) ; 102.758,96.012 105.249,96.012 ; 102.758,98.552 105.177,98.552 ; v1@102.946,100.571 105.55,100.571 106.661,99.46 108.526,99.46 ; 105.283,96.046 105.444,96.046 105.658,96.26 108.526,96.26 ; 105.283,98.446 105.283,98.171 106.394,97.06 108.526,97.06 ; 108.198,101.86 108.526,101.86 ; 110.236,41.529 v1@110.236,44.45 ; 111.448,113.284 111.448,112.072 112.268,111.252 v1(117.602,111.252) ; v1@111.948,50.358 v1(112.014,50.292) ; 111.948,52.113 112.946,52.113 v1(113.665,52.832) ; 113.03,113.342 113.03,116.332 ; 113.835,54.313 113.835,54.399 ; 113.976,94.81 113.976,93.669 114.554,93.091 v1(114.554,92.71) ; 116.124,57.676 118.124,55.676 ; 117.026,97.86 119.374,97.86 120.174,97.06 v1(120.269,97.155) ; 118.676,52.324 118.676,50.742 119.38,50.038 ; 119.38,45.212 119.38,47.879 ; 120.719,112.309 121.793,113.665 ; 122.695,110.925 123.825,112.268 ; 123.944,109.847 123.944,110.051 ; v1(131.064,85.656) 132.403,86.995 137.033,86.995 138.109,85.919 138.109,85.852 ; 136.442,91.791 138.049,92.456 ; 90.551,45.72 90.551,45.085 89.789,45.085 89.789,45.402 89.789,45.72 90.551,45.72
  Top Layer w0.45: 69.469,54.483 69.469,57.661 v1(70.736,58.928) ; 73.536,58.928 73.79,59.182 v1@78.232,59.182 ; 108.526,98.66 110.344,98.66 110.49,98.806 v1(111.76,100.203) ; 110.871,116.332 110.871,118.745 ; v1(123.952,88.646) 127.762,88.646 128.27,89.154 128.27,91.186
  Top Layer w0.5: 60.551,87.122 ccw(c61.821,87.122) 61.821,85.852 65.865,85.852 ; 60.587,87.144 cw(c99.979,80.198) 139.371,87.144 ; 65.405,100.33 v3(72.263,100.33) ; 65.864,85.811 cw(c65.831,84.362) 67.281,84.329 ; 67.241,57.215 ccw(c99.979,80.198) 132.637,57.102 ; 67.262,57.23 67.262,84.329 ; v3(76.708,99.441) 80.394,99.441 80.518,99.565 ; 79.883,45.593 82.869,50.066 ; 80.688,51.482 81.915,53.34 84.836,51.435 84.836,47.498 88.108,44.226 ; 87.63,44.704 88.138,44.196 91.694,44.196 92.456,44.958 92.456,45.974 93.726,47.244 95.568,47.244 96.566,46.246 ; 88.209,102.388 v1@88.209,105.466 ; 96.566,43.734 96.566,44.246 ; 96.992,108 96.992,105.573 v1(97.536,105.029) ; 100.566,44.246 102.566,46.246 ; 106.045,54.313 106.088,54.313 v1(106.68,53.721) 106.723,53.721 107.315,54.313 ; 110.048,51.054 109.54,50.546 v1(109.474,50.546) 110.048,49.972 ; 110.048,52.113 110.048,49.972 ; 115.951,47.625 115.951,48.768 115.443,49.276 110.744,49.276 110.048,49.972 ; 120.124,57.676 120.124,55.676 120.104,55.676 121.446,54.323 ; 121.412,46.482 121.412,54.323 ; 128.27,89.662 129.577,90.969 ; 128.27,91.186 129.667,91.186 132.539,94.058 135.616,94.058 137.287,94.742 ; 132.609,84.328 cw(c134.099,84.362) 134.066,85.852 138.109,85.852 ccw(c138.109,87.122) 139.379,87.122 ; 132.636,57.103 132.636,84.328
  Top Layer w0.6: 61.976,92.583 63.848,91.923 ; 80.642,99.441 v4@87.122,99.441 ; v2(91.694,81.026) v2(91.694,94.615) ; 96.992,110 96.992,111.47 98.044,112.522 100.584,112.522 101.232,113.17 101.232,114.808 ; 98.679,118.364 98.679,120.142 ; 100.566,46.246 100.566,48.877 106.002,54.313 110.998,54.313 113.835,54.313 ; 101.092,114.681 101.092,118.25 ; 101.092,118.364 101.092,120.015 ; 102.566,46.246 102.566,47.575 103.124,48.133 113.665,48.133 114.173,47.625 ; v1@111.948,50.358 111.948,52.113 ; 113.835,54.399 115.112,55.676 116.124,55.676 ; 115.951,43.561 115.951,47.625
  Bottom Layer w0.3: 116.124,52.959 116.124,52.659 116.586,52.197 116.586,51.562
  Bottom Layer w0.35: 63.327,90.491 65.777,90.491 66.548,89.72 66.548,89.789 ; 67.31,97.282 68.326,97.282 68.326,96.266 67.92,96.672 68.097,96.672 68.326,96.901 ; 75.692,57.15 75.692,53.594 76.2,53.086 77.724,53.086 78.74,54.102 78.74,54.436 ; 76.35,110.25 78.2,108.4 79.56,108.4 82.296,108.4 82.619,108.4 83.947,109.728 93.345,109.728 96.266,106.807 103.759,106.807 105.537,108.585 115.951,108.585 117.983,106.553 v1(118.999,105.537) ; 76.695,63.322 76.695,64.503 79.121,66.929 92.075,66.929 96.444,62.56 96.888,62.56 ; 76.944,85.648 76.944,84.092 77.978,83.058 90.17,83.058 94.55,87.376 94.55,94.107 95.504,95.123 100.203,95.123 101.219,96.139 101.219,98.044 98.933,100.33 v1(97.536,100.33) ; v1@78.676,104.838 81.28,107.442 83.312,107.442 84.582,108.712 93.091,108.712 95.631,106.172 104.14,106.172 105.918,107.95 115.697,107.95 116.459,107.188 v1(116.459,106.68) ; 78.944,85.648 78.944,84.759 79.629,84.074 90.17,84.074 93.853,87.757 93.853,94.488 95.25,95.885 99.949,95.885 100.584,96.52 100.584,97.663 99.314,98.933 v1(98.044,98.933) ; v1(79.629,49.53) 81.407,51.943 81.407,55.822 v1(80.137,57.092) ; v1(80.264,58.801) 81.788,60.325 82.804,60.325 85.598,63.119 v1(93.726,63.119) ; v1(80.645,48.895) 82.042,50.292 v1(82.042,57.092) ; 81.28,110.617 81.661,110.236 82.931,110.236 83.312,110.617 ; v1(82.169,58.674) 83.058,59.563 83.82,59.563 86.233,61.976 v1(94.488,61.976) ; 84.201,53.536 84.328,53.409 85.979,53.409 85.979,48.26 89.272,44.967 v1(90.17,45.339) 91.186,45.847 93.599,48.26 107.696,48.26 109.906,46.05 110.223,46.05 ; 84.201,55.176 84.328,55.303 v1(84.328,56.642) ; 85.979,55.049 v1(85.979,56.642) ; v1(85.979,58.801) 86.741,58.039 92.075,58.039 v1(94.488,55.626) ; v1(86.741,65.278) 86.741,66.929 ; v1(87.757,59.817) 87.757,59.436 88.392,58.801 97.282,58.801 99.06,60.579 ; v1(88.265,49.276) 97.917,49.276 ; 88.887,64.719 88.887,63.132 88.9,63.119 ; v1(89.408,93.091) 88.011,94.488 81.026,94.488 77.978,97.536 77.978,102.616 81.915,106.553 83.439,106.553 84.836,107.95 92.837,107.95 97.028,103.759 97.79,103.759 101.981,99.568 105.283,99.568 107.569,101.854 107.569,103.124 107.188,103.505 105.283,103.505 104.648,104.14 v1(104.648,104.8) ; v1(90.551,79.121) 98.552,71.12 98.552,65.405 101.092,62.865 101.092,62.288 ; v1(90.551,93.091) 90.551,93.726 89.027,95.25 81.28,95.25 78.613,97.917 78.613,102.235 82.042,105.664 83.439,105.664 84.963,107.188 92.71,107.188 96.774,103.124 97.282,103.124 101.727,98.679 105.283,98.679 108.331,101.727 108.331,104.013 107.315,105.029 v1(107.315,105.664) ; v1(91.186,55.245) 91.694,54.737 95.631,54.737 101.092,60.198 101.092,60.648 ; v1(91.313,51.181) 97.663,51.181 101.219,54.737 103.505,54.737 104.648,53.594 104.648,51.816 105.461,51.003 106.667,51.003 ; 91.427,64.719 93.396,64.719 94.742,63.373 v1@94.742,61.976 ; v1(92.964,59.944) 92.964,60.706 93.167,60.909 96.888,60.909 ; 93.218,63.119 93.472,62.865 93.853,62.865 93.98,62.992 93.98,63.246 93.853,63.373 93.599,63.373 93.345,63.119 ; v1(93.472,103.505) 93.98,103.505 95.631,101.854 95.631,101.219 94.079,99.667 v1(93.853,98.425) ; v1(93.853,104.659) 94.096,104.659 96.52,102.235 96.52,101.092 v1(94.869,99.06) ; 93.98,61.976 94.615,62.611 94.742,62.611 ; v1(95.377,92.964) 95.885,93.472 101.727,93.472 v1(102.997,94.742) ; v1(96.393,115.824) 96.901,115.824 97.282,116.205 111.125,116.205 121.031,106.299 v1(121.031,105.918) ; 98.044,49.276 v1@102.012,53.244 ; 99.187,111.633 99.949,110.871 99.949,109.043 100.992,108 ; v1(99.314,105.156) 103.759,105.156 104.14,105.537 104.521,105.537 106.045,107.061 107.315,107.061 109.22,105.156 109.22,101.473 106.045,98.298 106.045,90.297 ; v1(109.474,91.948) 111.506,93.218 v1(113.157,93.218) ; v1(110.236,90.932) 111.633,92.329 114.336,92.329 v1(114.554,92.71) ; v1(110.236,97.409) 111.074,98.247 111.239,98.247 111.239,97.052 111.208,97.02 ; v1(111.76,100.203) 112.065,99.898 113.271,99.898 ; v1(112.903,101.346) 122.174,101.346 123.825,99.695 123.825,93.218 124.587,92.456 129.667,92.456 130.175,91.948 v1(130.175,89.535) ; 115.443,86.995 116.586,88.138 118.618,88.138 119.126,88.646 119.126,93.218 117.983,94.361 v1(117.983,94.615) ; v1(116.967,93.599) 116.967,93.345 117.856,92.456 117.856,89.408 ; v1(117.602,111.252) 118.364,111.252 127,102.616 127,100.457 127,97.536 128.27,96.266 ; v1(120.084,99.568) 120.084,98.356 120.142,98.298 ; v1(120.218,82.283) v1@120.396,82.461 ; 120.396,89.408 120.396,91.186 120.904,91.694 ; v1(127.889,103.632) 131.318,100.203 131.318,88.265 ; v1(131.064,85.656) 133.045,86.881 ; 133.858,88.265 133.985,88.265 134.493,88.773 134.62,88.773 135.128,88.265 ; v1(134.493,88.519) 134.696,88.316 134.696,86.881
  Bottom Layer w0.4: 64.135,98.044 66.421,98.044 70.612,93.853 v1(72.136,93.853) 72.644,93.853 73.66,92.837 v1(82.042,92.837) ; 66.548,88.08 66.548,86.919 67.589,85.877 ; 67.183,85.979 67.056,85.979 66.802,86.233 67.063,86.233 67.183,86.113 67.183,85.471 66.548,86.106 66.548,85.725 66.548,87.757 68.326,89.535 74.295,89.535 ; 70.736,59.563 70.736,59.37 71.374,58.732 ; 71.501,93.853 71.501,93.98 71.882,94.361 72.009,94.361 72.517,93.853 ; v1(74.155,61.671) 75.641,60.185 76.721,60.185 77.216,59.69 77.216,57.912 v1(78.232,56.896) v1@78.105,56.896 ; 74.64,88.047 74.64,89.19 ; 75.692,58.732 70.932,58.732 v1(70.736,58.928) 70.736,61.465 72.644,63.373 74.105,63.373 74.155,63.322 76.695,63.322 ; 76.695,61.671 77.267,61.671 78.232,60.706 v1(78.232,59.309) ; 76.9,49.846 76.9,51.816 ; 76.9,54.436 76.9,55.691 v1@78.105,56.896 ; 76.918,49.87 ccw(c99.979,80.198) 99.567,42.1 100.566,43.099 100.566,44.246 ; 77.47,113.284 79.375,110.617 93.98,110.617 96.597,108 96.992,108 ; 77.696,57.432 77.696,56.67 77.879,56.67 v1@78.105,56.896 ; 77.82,51.816 77.82,50.323 v1(77.851,50.292) ; v1(78.359,95.25) 79.883,93.726 86.868,93.726 88.519,92.075 92.075,92.075 v1(92.964,92.964) ; 80.518,101.6 81.153,102.235 81.153,102.362 ; 80.823,113.383 81.12,114.335 cw(c99.979,80.198) 94.001,118.737 ; 82.817,100.254 83.629,99.441 v4@86.741,99.441 ; v1(85.725,100.457) 85.725,101.346 86.233,101.854 94.361,101.854 v1@94.615,101.6 ; 89.272,44.967 91.177,44.967 91.186,44.976 91.186,45.847 90.932,45.593 90.932,44.967 90.53,45.369 90.129,44.967 89.662,44.967 ; 89.768,45.173 89.768,45.572 89.836,45.64 90.772,45.64 ; v1(89.916,114.427) 92.402,111.633 99.187,111.633 ; 91.694,98.298 92.837,97.155 v1(99.822,97.155) ; 93.98,118.745 94.488,118.237 94.488,117.245 102.489,117.094 102.616,118.364 103.392,119.048 cw(c99.979,80.198) 118.419,114.563 117.348,113.03 122.936,109.093 123.944,110.051 125.085,110.051 ; 95.019,119.892 v1(95.218,118.84) ; 100.992,110 100.992,111.025 104.267,114.3 106.368,114.3 ; 106.045,90.297 106.045,89.154 107.823,87.376 108.4,87.376 ; 108.008,114.3 111.633,114.3 120.142,105.791 120.142,104.902 120.142,104.14 119.253,103.251 112.268,103.251 107.95,98.933 107.95,96.266 109.728,94.488 110.49,94.488 116.078,94.488 v1(116.967,93.599) ; 110.04,87.376 110.421,86.995 115.443,86.995 ; 110.223,46.05 111.938,46.05 ; v1(113.665,52.832) 113.665,56.515 114.826,57.676 116.124,57.676 ; 116.124,55.676 116.124,52.024 117.625,50.523 117.625,45.418 ccw(c99.979,80.198) 131.719,57.535 ; 117.625,46.228 117.625,46.078 117.983,45.72 ; 117.625,46.482 117.625,46.459 118.237,45.847 ; v1(120.269,97.155) 121.412,97.155 121.793,96.774 121.793,92.329 126.619,87.503 127.185,87.503 v1(129.032,85.656) ; v1@120.396,82.461 120.396,86.868 ; 125.137,109.999 cw(c99.979,80.198) 134.778,97.806 ; 125.73,91.186 125.73,89.789 127.254,88.265 139.192,88.265 ; v1(129.032,84.016) 129.032,83.566 131.699,80.899 131.699,75.829 131.699,57.531 ; 134.747,97.79 133.096,96.139 135.447,90.359 136.963,90.359 ; 74.295,89.535 74.944,88.886 74.944,87.648 74.295,88.297 74.295,89.535
  Bottom Layer w0.45: v1(97.536,105.029) 97.536,104.902 98.171,104.902 102.489,100.584 v1(102.997,100.584) ; v1(110.236,97.409) 111.506,96.901 118.11,96.901 119.507,98.298 121.92,98.298 122.936,97.282 122.936,92.837 124.587,91.186 125.73,91.186 ; v1(111.76,100.203) 110.617,100.203 109.093,98.679 109.093,96.774 109.855,96.012 119.761,96.012 120.904,94.869 120.904,91.694 v1(123.952,88.646)
  Bottom Layer w0.5: 60.551,87.122 ccw(c61.821,87.122) 61.821,85.852 65.865,85.852 ; 60.587,87.144 cw(c99.979,80.198) 139.371,87.144 ; 65.864,85.811 cw(c65.831,84.362) 67.281,84.329 ; 67.241,57.215 ccw(c99.979,80.198) 132.637,57.102 ; 67.262,57.23 67.262,84.328 ; v3(72.263,100.33) 73.152,99.441 v3(76.708,99.441) ; 82.817,101.905 82.817,102.121 84.963,104.267 v1(86.614,104.267) ; 106.667,51.003 109.55,51.003 110.236,51.689 114.427,51.689 115.951,50.165 115.951,47.625 ; 106.68,52.667 v1(106.68,53.721) ; 108.966,51.003 109.017,51.003 v1(109.474,50.546) 109.474,50.927 109.82,51.273 ; 132.609,84.328 cw(c134.099,84.362) 134.066,85.852 138.109,85.852 ccw(c138.109,87.122) 139.379,87.122 ; 132.636,57.103 132.636,84.328
  Bottom Layer w0.6: 69.088,56.31 69.088,77.724 72.39,81.026 v2(91.694,81.026) ; 69.151,56.31 ccw(c99.979,80.198) 101.228,41.218 102.566,42.556 102.566,44.246 ; 82.626,101.905 82.817,101.905 ; v1@88.062,105.651 84.442,105.651 81.153,102.362 80.772,102.362 v2(80.518,102.362) 80.518,98.425 82.804,96.139 89.281,96.139 v2(91.694,94.615) ; 112.014,42.164 v1(112.014,50.292)
  other v1: 110.236,44.323 116.459,52.324 102.042,53.213 67.92,97.078
  other v4: 87.757,99.568

## Keep-outs
Keep-Out Layer:
  lines w0.2: 60.132,86.861 cw(c99.979,80.198) 139.765,87.213 ; 60.142,86.859 ccw(c61.821,87.122) 61.821,85.422 65.854,85.361 cw(c65.831,84.362) 66.831,84.339 ; 66.833,57.1 ccw(c99.979,80.198) 133.118,57.09 ; 66.837,57.103 66.837,84.328 ; 133.1,57.103 133.1,84.328 ; 133.099,84.339 cw(c134.099,84.362) 134.077,85.361 138.049,85.4 ; 138.109,85.422 ccw(c138.109,87.122) 139.807,87.216

## Other copper
Top Layer:
  text "R" at 131.953,110.109 h6
  text "11/2017" at 131.826,75.565 h2 r90
  text "F" at 127,58.42 h6
Bottom Layer:
  rectangle: 86.487,97.028 92.837,101.092
  text "R" at 68.453,110.617 h6

## Silkscreen, mask and mechanical layers (free items; w line width, h text height)
Top Overlay:
  drawing of 1246 lines, arcs and shapes, not listed
  text "A1" at 104.267,116.586 h1.3
  text "D12" at 98.171,115.951 h1.3
  text "D13" at 107.823,115.697 h1.3
  text "D11" at 100.457,111.506 h1.3
  text "RX" at 97.917,111.252 h1.5
  text "GND" at 92.583,109.728 h1.5
  text "SDA" at 104.648,109.728 h1.5
  text "A2" at 73.406,108.331 h1.3
  text "A0" at 125.349,108.331 h1.3
  text "SCL" at 104.775,107.569 h1.5
  text "3V3" at 92.71,107.315 h1.5
  text "<35°" at 118.999,107.188 h1.2
  text "<35°" at 77.343,106.934 h1.2
  text "F" at 110.49,106.807 h9
  text "RS" at 100.457,105.664 h1.5
  text "TX" at 98.298,105.537 h1.5
  text "UoM" at 70.104,100.711 h5
  text "IR  MO" at 130.175,98.425 h1.4
  text "MI  SK" at 130.175,96.901 h1.4
  text "D4:IR" at 79.375,94.234 h1.3
  text "D5: Right PWM" at 98.065,93.705 h1.3
  text "CS CE" at 130.048,93.345 h1.4
  text "D6: Left PWM" at 98.044,92.71 h1.3
  text "D9: Left DIR" at 98.044,91.694 h1.3
  text "D10: Right DIR" at 97.917,90.678 h1.3
  text "V    G" at 130.048,90.678 h1.4
  text "D3" at 78.359,90.297 h1.3
  text "3V3" at 78.359,90.297 h1.2
  text "RIGHT" at 82.931,89.535 h2
  text "PB  GND" at 78.232,89.281 h1.2
  text "A3" at 61.976,87.884 h1.3
  text "<70°" at 135.382,87.884 h1.2
  text "<70°" at 65.405,87.503 h1.2
  text "M-" at 69.215,87.249 h2
  text "M-" at 84.709,87.249 h2
  text "A7" at 137.16,87.122 h1.3
  text "A6:BAT Sample" at 127.254,86.868 h1.3
  text "M+" at 84.582,84.836 h2
  text "M+" at 69.088,84.709 h2
  text "3V3" at 73.406,83.058 h1.3
  text "LEFT" at 68.707,82.296 h2
  text "GND  PB" at 73.406,82.169 h1.2
  text "D2" at 76.327,81.28 h1.3
  text "MONA-v2.2" at 68.707,79.121 h2
  text "uomrobotics.com" at 100.457,64.77 h2.5 r90
  text "+" at 74.422,59.944 h2
  text "3V3 | LED | GND" at 105.791,59.436 h1.2
  text "BAT |  3V3 | GND" at 105.664,58.293 h1.2
  text "F.Arvin" at 132.08,56.896 h2 r90
Bottom Overlay:
  drawing of 2284 lines, arcs and shapes, not listed
  text "University of" at 125.349,77.089 h3 r90
  text "F" at 75.184,76.835 h8
  text "Manchester" at 128.27,76.581 h3 r90
  text "www.monarobot.uk" at 112.268,69.723 h3

## Text inside footprints (layer, text, board x,y; h text height)
J1: Top Overlay "Motors" at 78.359,82.042 h3
"J5- ISP": Top Overlay "MISO  SCK   RST" at 113.538,83.947 h1.27; Top Overlay "1" at 113.03,85.09 h1.27; Top Overlay "6" at 122.174,89.154 h1.27; Top Overlay "VCC  MOSI  GND" at 113.411,91.44 h1.27
RST: Top Overlay "PB" at 87.376,114.935 h1
?: Top Overlay "PRG  ON  OFF" at 92.583,49.276 h2.7
?: Top Overlay "XT" at 104.521,96.685 h1.5
?: Top Overlay "MOTOR" at 108.077,69.088 h3.5
?: Top Overlay "MOTOR" at 83.532,69.111 h3.5